# EAGLE board brain (EAGLE 6.1)
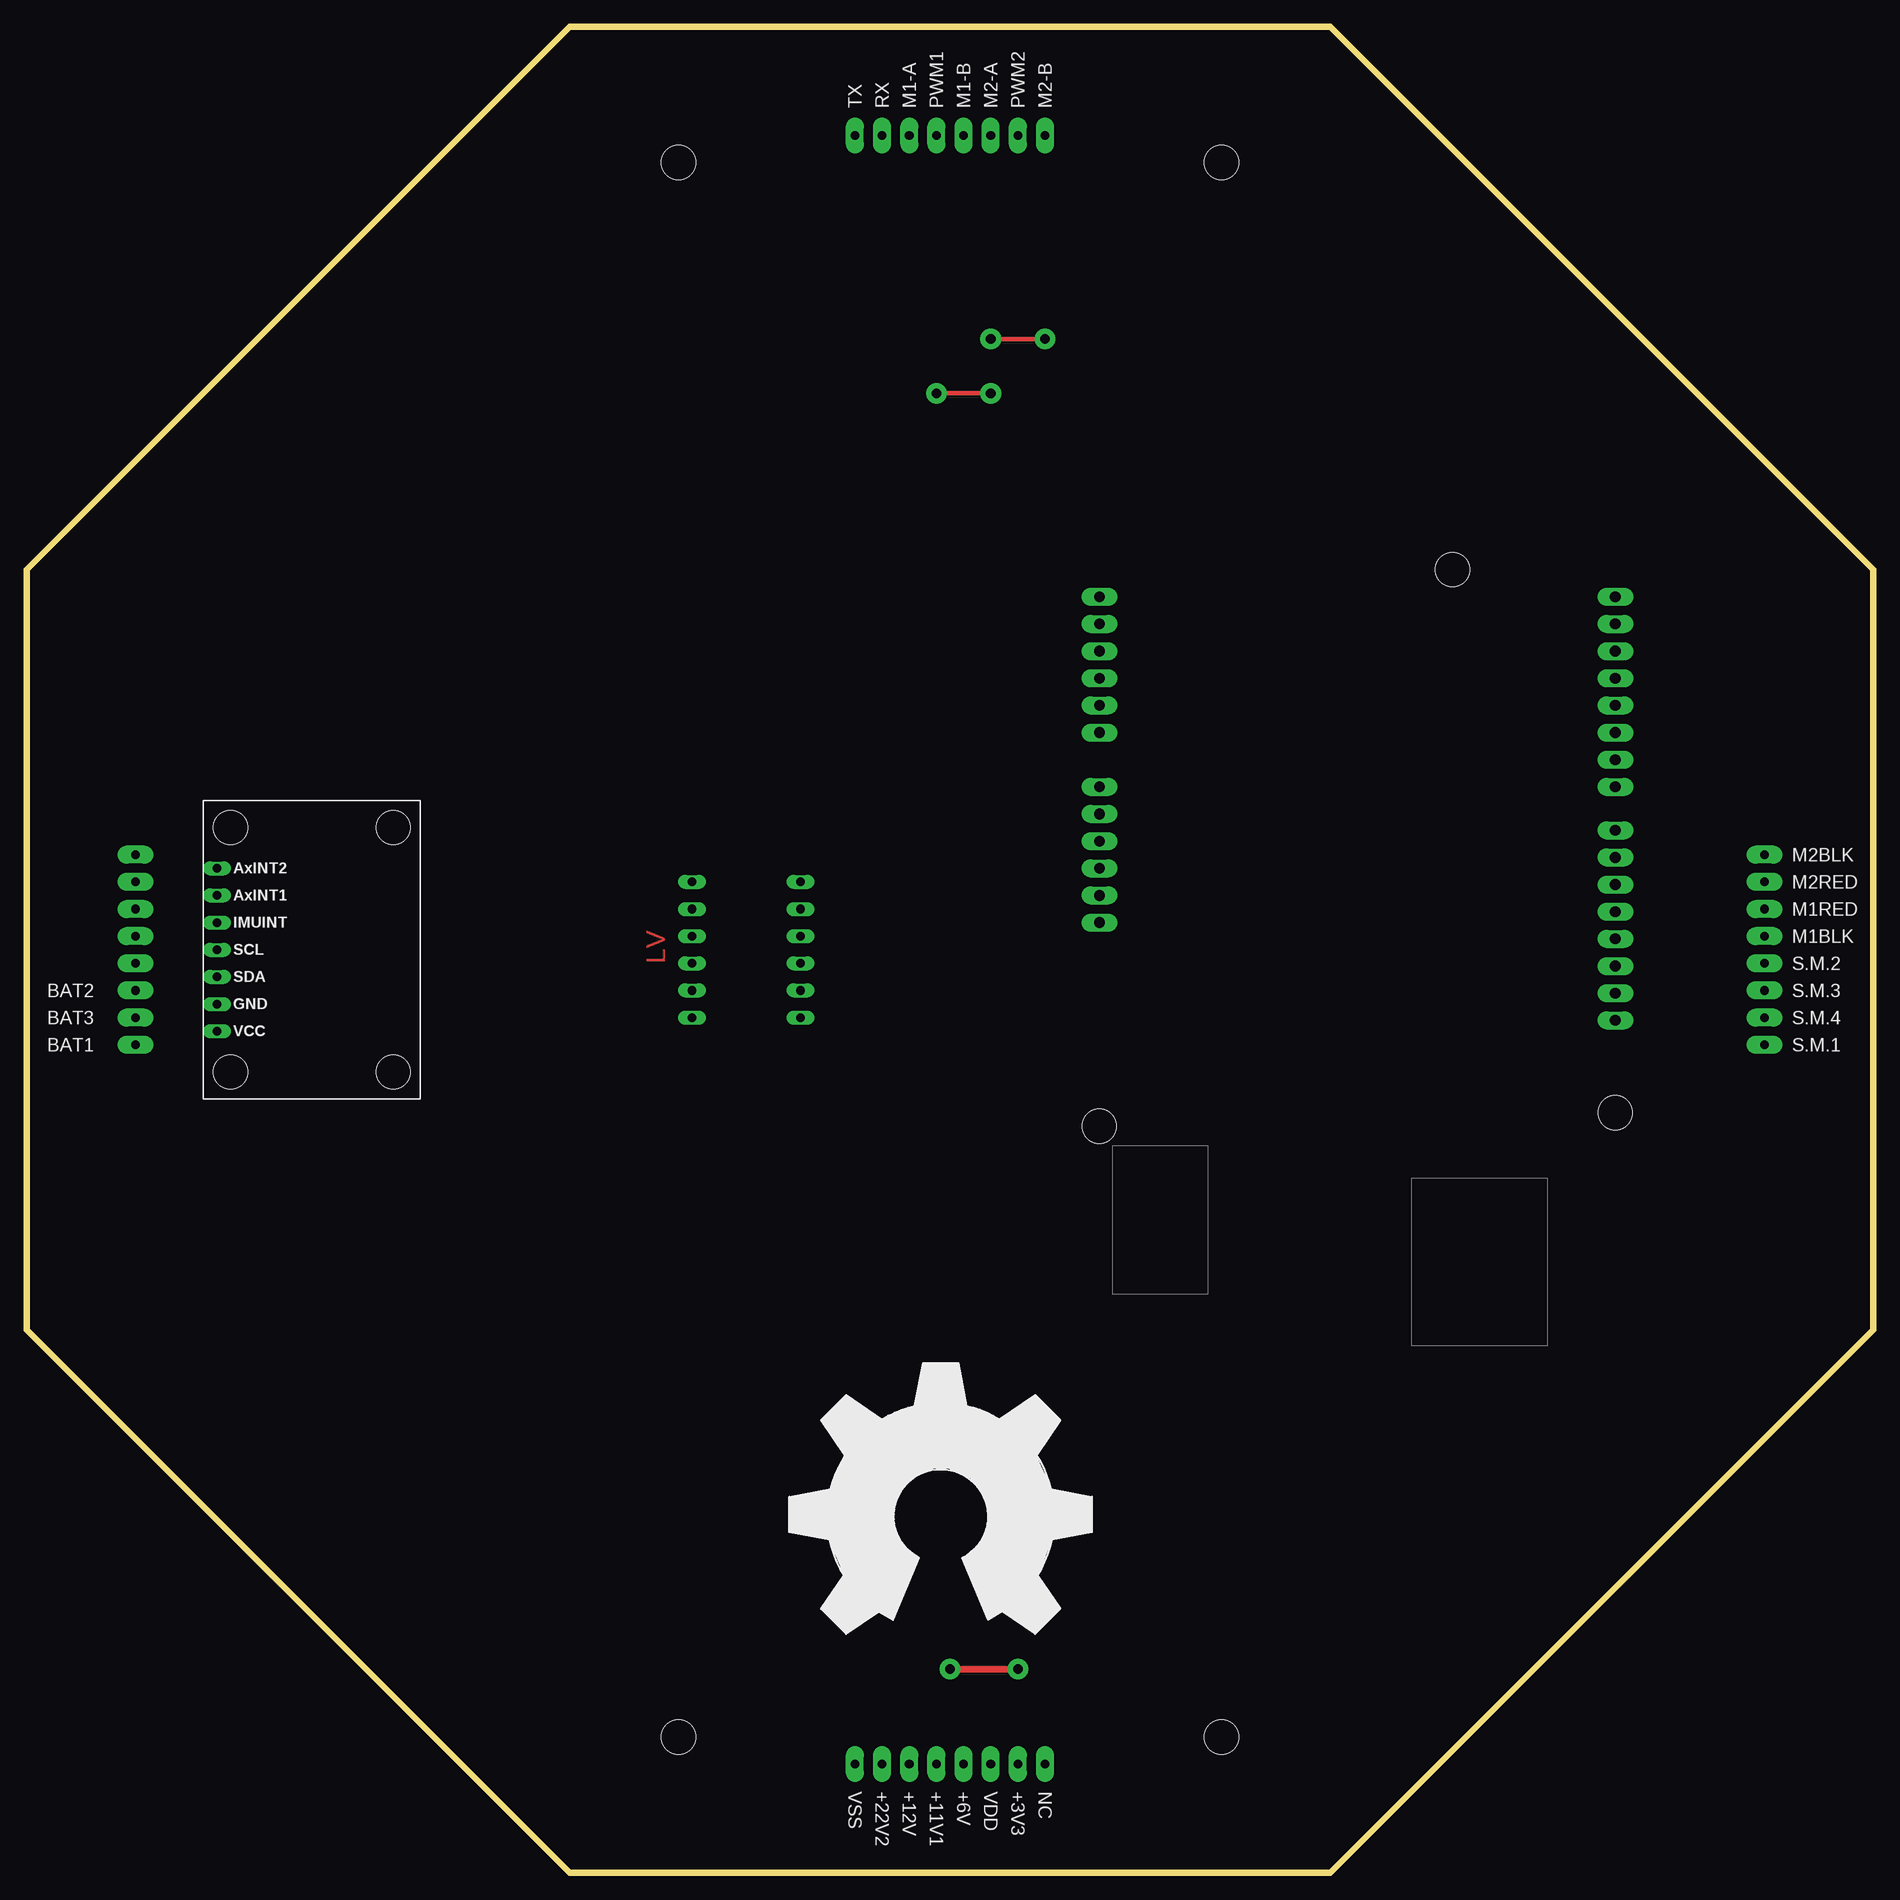
[diagram p0: board, top side]
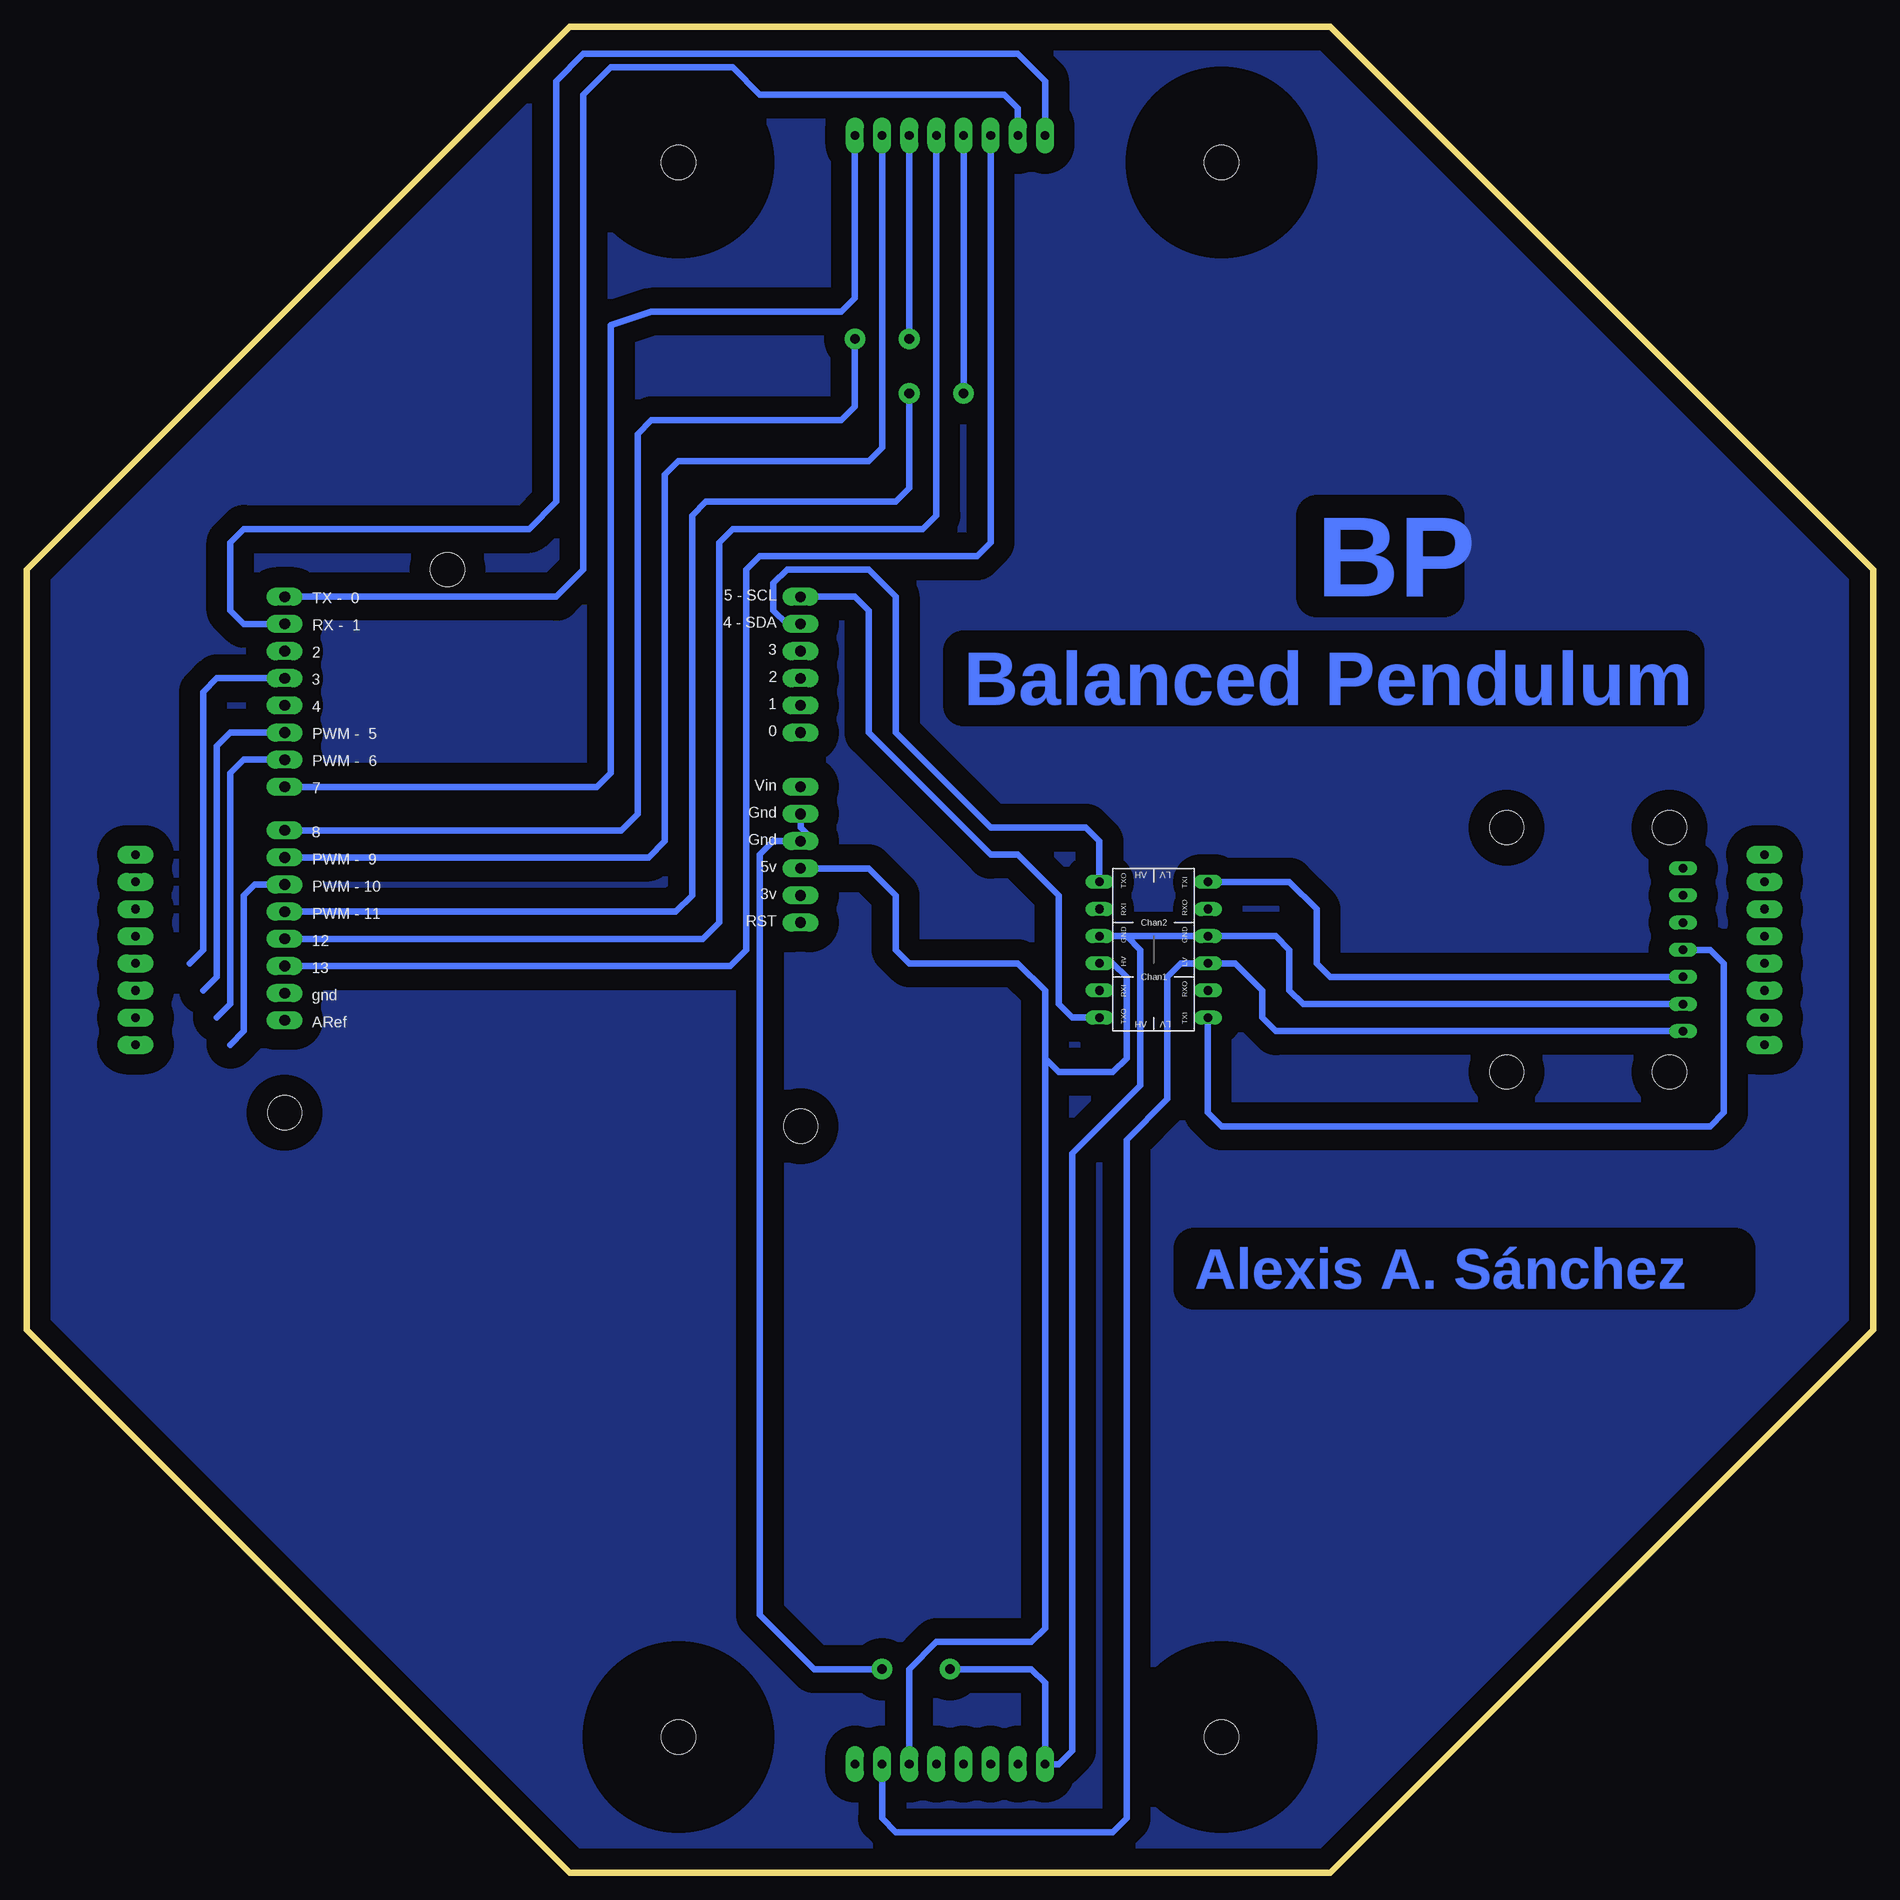
[diagram p1: board, bottom side, seen from below]

Size 172.72 x 172.72 mm. Coordinates in mm from the lower left corner, seen from the top.
Copper layers (1*16): Top 0.035mm / dielectric 1.5mm / Bottom 0.035mm
Design rules: minimum track width 10mil, minimum drill 24mil, track to track 8mil, track to pad 8mil, pad to pad 8mil, via to via 8mil, smd to smd 8mil, copper to edge 20mil, drill to drill 8mil, minimum pad ring 10mil, minimum via ring 8mil, stop-mask expansion 4mil, vias tented up to drill 0mil, thermal gap 10mil

## Footprints (pad centres in the part's own frame; a part is rotated, then mirrored left to right if it is on the bottom)
BASE = drill 0.8 pad 1.676 long: PIN00 8.89,76.2; PIN01 6.35,76.2; PIN02 3.81,76.2; PIN03 1.27,76.2; PIN04 -1.27,76.2; PIN05 -3.81,76.2; PIN06 -6.35,76.2; PIN07 -8.89,76.2; PIN08 -76.2,8.89; PIN09 -76.2,6.35; PIN10 -76.2,3.81; PIN11 -76.2,1.27; PIN12 -76.2,-1.27; PIN13 -76.2,-3.81; PIN14 -76.2,-6.35; PIN15 -76.2,-8.89; PIN16 -8.89,-76.2; PIN17 -6.35,-76.2; PIN18 -3.81,-76.2; PIN19 -1.27,-76.2; PIN20 1.27,-76.2; PIN21 3.81,-76.2; PIN22 6.35,-76.2; PIN23 8.89,-76.2; PIN24 76.2,-8.89; PIN25 76.2,-6.35; PIN26 76.2,-3.81; PIN27 76.2,-1.27; PIN28 76.2,1.27; PIN29 76.2,3.81; PIN30 76.2,6.35; PIN31 76.2,8.89 | hole 3.2: -25.4,73.66; 25.4,73.66; -25.4,-73.66; 25.4,-73.66
ARDUINO = drill 1 pad 1.676 long: 3V 35.56,2.54; 5V 38.1,2.54; A0 50.8,2.54; A1 53.34,2.54; A2 55.88,2.54; A3 58.42,2.54; A4 60.96,2.54; A5 63.5,2.54; AREF 23.876,50.8; D0 63.5,50.8; D1 60.96,50.8; D2 58.42,50.8; D3 55.88,50.8; D4 53.34,50.8; D5 50.8,50.8; D6 48.26,50.8; D7 45.72,50.8; D8 41.656,50.8; D9 39.116,50.8; D10 36.576,50.8; D11 34.036,50.8; D12 31.496,50.8; D13 28.956,50.8; GND 26.416,50.8; GND1 43.18,2.54; GND2 40.64,2.54; RESET 33.02,2.54; VIN 45.72,2.54 | hole 3.2: 15.24,50.8; 66.04,35.56; 13.97,2.54
IMU3000-COMBO = drill 0.8 long: 3V3 1.27,6.35; AXINT1 1.27,19.05; AXINT2 1.27,21.59; IMUINT 1.27,16.51; SCL 1.27,13.97; SDA 1.27,11.43; VSS 1.27,8.89 | hole 3.2: 2.54,25.4; 17.78,25.4; 17.78,2.54; 2.54,2.54
LEVEL-CONVERTER = drill 0.8 long: P$1 -1.27,13.97; P$2 -1.27,11.43; P$3 -1.27,8.89; P$4 -1.27,6.35; P$5 -1.27,3.81; P$6 -1.27,1.27; P$7 8.89,1.27; P$8 8.89,3.81; P$9 8.89,6.35; P$10 8.89,8.89; P$11 8.89,11.43; P$12 8.89,13.97

## Placement (x,y rotation side)
U$1  BASE  [BASE]  86.36,86.36 0 top
U$3  [OSHW_FILLX1000_NOTEXT]  71.32,22.31 0 top
U$6  ARDUINOUNO  [ARDUINO]  97.79,55.88 90 bottom
U$7  IMU3000COMBO  [IMU3000-COMBO]  16.51,72.39 0 top
U$8  LOGIC-LEVEL-CONVERTER  [LEVEL-CONVERTER]  63.5,93.98 180 bottom

## Library data of the parts
U$1 U$7 U$8 = aasanchez
U$3 = OSHW
U$6 = adafruit

## Nets
+3V3: U$1.PIN22 U$7.3V3 U$8.P$3
GND: U$6.GND
M1-A: U$1.PIN05 U$6.D13
M1-B: U$1.PIN03 U$6.D12
M2-A: U$1.PIN02 U$6.D8
M2-B: U$1.PIN00 U$6.D7
N$1: U$7.SCL U$8.P$1
N$2: U$7.SDA U$8.P$6
N$5: U$6.3V
PWM1: U$1.PIN04 U$6.D11
PWM2: U$1.PIN01 U$6.D9
RX: U$1.PIN06 U$6.D0
SCL: U$6.A5 U$8.P$12
SDA: U$6.A4 U$8.P$7
SERVO1: U$6.D10
SERVO2: U$6.D3
SERVO3: U$6.D5
SERVO4: U$6.D6
TX: U$1.PIN07 U$6.D1
VDD: U$1.PIN21 U$6.5V U$8.P$10
VIN: U$6.VIN
VSS: U$1.PIN16 U$6.GND1 U$6.GND2 U$7.VSS U$8.P$4 U$8.P$9

## Tracks (layer width: path | path; a pad name or v marks a point on that pad's centre or on a via)
+3V3
  Bottom 0.61: U$1.PIN22 92.71,5.08 91.44,3.81 71.12,3.81 69.85,5.08 69.85,68.58 66.04,72.39 66.04,83.82 64.77,85.09 U$8.P$3 59.69,85.09 57.15,82.55 57.15,80.01 55.88,78.74 U$7.3V3
M1-A
  Bottom 0.61: U$6.D13 106.93,84.84 105.41,86.36 105.41,121.92 104.14,123.19 83.82,123.19 82.55,124.46 U$1.PIN05
M1-B
  Bottom 0.61: U$6.D12 109.47,87.38 107.95,88.9 107.95,124.46 106.68,125.73 88.9,125.73 87.63,127 U$1.PIN03
M2-A  (via drill 0.9 pad 1.93)
  Top 0.406: v95.25,143.51 v90.17,143.51
  Bottom 0.61: U$6.D8 117.09,97.54 115.57,99.06 115.57,134.62 114.3,135.89 96.52,135.89 95.25,137.16 v95.25,143.51 | v90.17,143.51 U$1.PIN02
M2-B
  Bottom 0.61: U$1.PIN00 95.25,147.32 96.52,146.05 114.3,146.05 118.11,144.78 118.11,102.87 119.38,101.6 U$6.D7
N$1
  Bottom 0.61: U$8.P$1 62.23,71.12 60.96,69.85 15.24,69.85 13.97,71.12 13.97,85.09 15.24,86.36 U$7.SCL
N$2
  Bottom 0.61: U$7.SDA 50.8,83.82 52.07,85.09 52.07,90.17 54.61,92.71 U$8.P$6
N$3
  pour Bottom (isolate 1.93): 121.92,0 50.8,0 0,50.8 0,121.92 50.8,172.72 121.92,172.72 172.72,121.92 172.72,50.8
N$4
  pour Bottom (isolate 1.93): 50.8,0 121.92,0 172.72,50.8 172.72,121.92 121.92,172.72 50.8,172.72 0,121.92 0,50.8
PWM1  (via drill 0.9 pad 1.93)
  Top 0.406: v90.17,138.43 v85.09,138.43
  Bottom 0.61: U$6.D11 112.01,89.92 110.49,91.44 110.49,127 109.22,128.27 91.44,128.27 90.17,129.54 v90.17,138.43 | v85.09,138.43 U$1.PIN04
PWM2
  Bottom 0.61: U$6.D9 114.55,95 113.03,96.52 113.03,130.81 111.76,132.08 93.98,132.08 92.71,133.35 U$1.PIN01
RX
  Bottom 0.61: U$1.PIN06 80.01,165.1 81.28,166.37 104.14,166.37 106.68,168.91 118.11,168.91 120.65,166.37 120.65,121.92 123.19,119.38 U$6.D0
SCL
  Bottom 0.61: U$8.P$12 74.93,80.01 76.2,81.28 76.2,91.44 80.01,95.25 82.55,95.25 93.98,106.68 93.98,118.11 95.25,119.38 U$6.A5
SDA
  Bottom 0.61: U$6.A4 101.6,116.84 102.87,118.11 102.87,120.65 101.6,121.92 93.98,121.92 91.44,119.38 91.44,106.68 82.55,97.79 73.66,97.79 72.39,96.52 U$8.P$7
SERVO1
  Bottom 0.61: U$6.D10 151.38,92.46 152.4,91.44 152.4,78.74 153.67,77.47
SERVO2
  Bottom 0.61: 157.48,85.09 156.21,86.36 156.21,110.49 154.94,111.76 U$6.D3
SERVO3
  Bottom 0.61: 156.21,82.55 154.94,83.82 154.94,105.41 153.67,106.68 U$6.D5
SERVO4
  Bottom 0.61: 154.94,80.01 153.67,81.28 153.67,102.87 152.4,104.14 U$6.D6
TX
  Bottom 0.61: U$6.D1 152.4,116.84 153.67,118.11 153.67,124.46 152.4,125.73 125.73,125.73 123.19,128.27 123.19,167.64 120.65,170.18 80.01,170.18 77.47,167.64 U$1.PIN07
VDD
  Bottom 0.61: U$6.5V 93.98,93.98 91.44,91.44 91.44,86.36 90.17,85.09 80.01,85.09 77.47,82.55 77.47,76.2 | U$1.PIN21 90.17,19.05 87.63,21.59 78.74,21.59 77.47,22.86 77.47,76.2 | U$8.P$10 71.12,85.09 69.85,83.82 69.85,76.2 71.12,74.93 76.2,74.93 77.47,76.2
VSS  (via drill 0.9 pad 1.93)
  Top 0.61: v86.36,19.05 v92.71,19.05
  Bottom 0.61: U$6.GND1 100.33,97.79 99.06,96.52 U$6.GND2 102.87,96.52 104.14,95.25 104.14,24.13 99.06,19.05 v92.71,19.05 | 71.12,87.63 U$8.P$9 69.85,87.63 | 69.85,87.63 U$8.P$4 55.88,87.63 54.61,86.36 54.61,82.55 53.34,81.28 U$7.VSS | 69.85,87.63 68.58,86.36 68.58,73.66 74.93,67.31 74.93,11.43 76.2,10.16 U$1.PIN16 77.47,17.78 78.74,19.05 v86.36,19.05

## Text on the board
Top: LV
Bottom: BP | Balanced Pendulum | Alexis A. Sánchez